# Altium PCB DS214SD.PcbDoc (part 1 of 2)
Units mm, origin at the board's own origin, x right, y up, seen from the top; angles counter-clockwise.
Board outline 549.66 x 200.53 mm, 2 copper layers (Top Layer, Bottom Layer); 205 components, 121 nets, 619 pads, 83 vias.
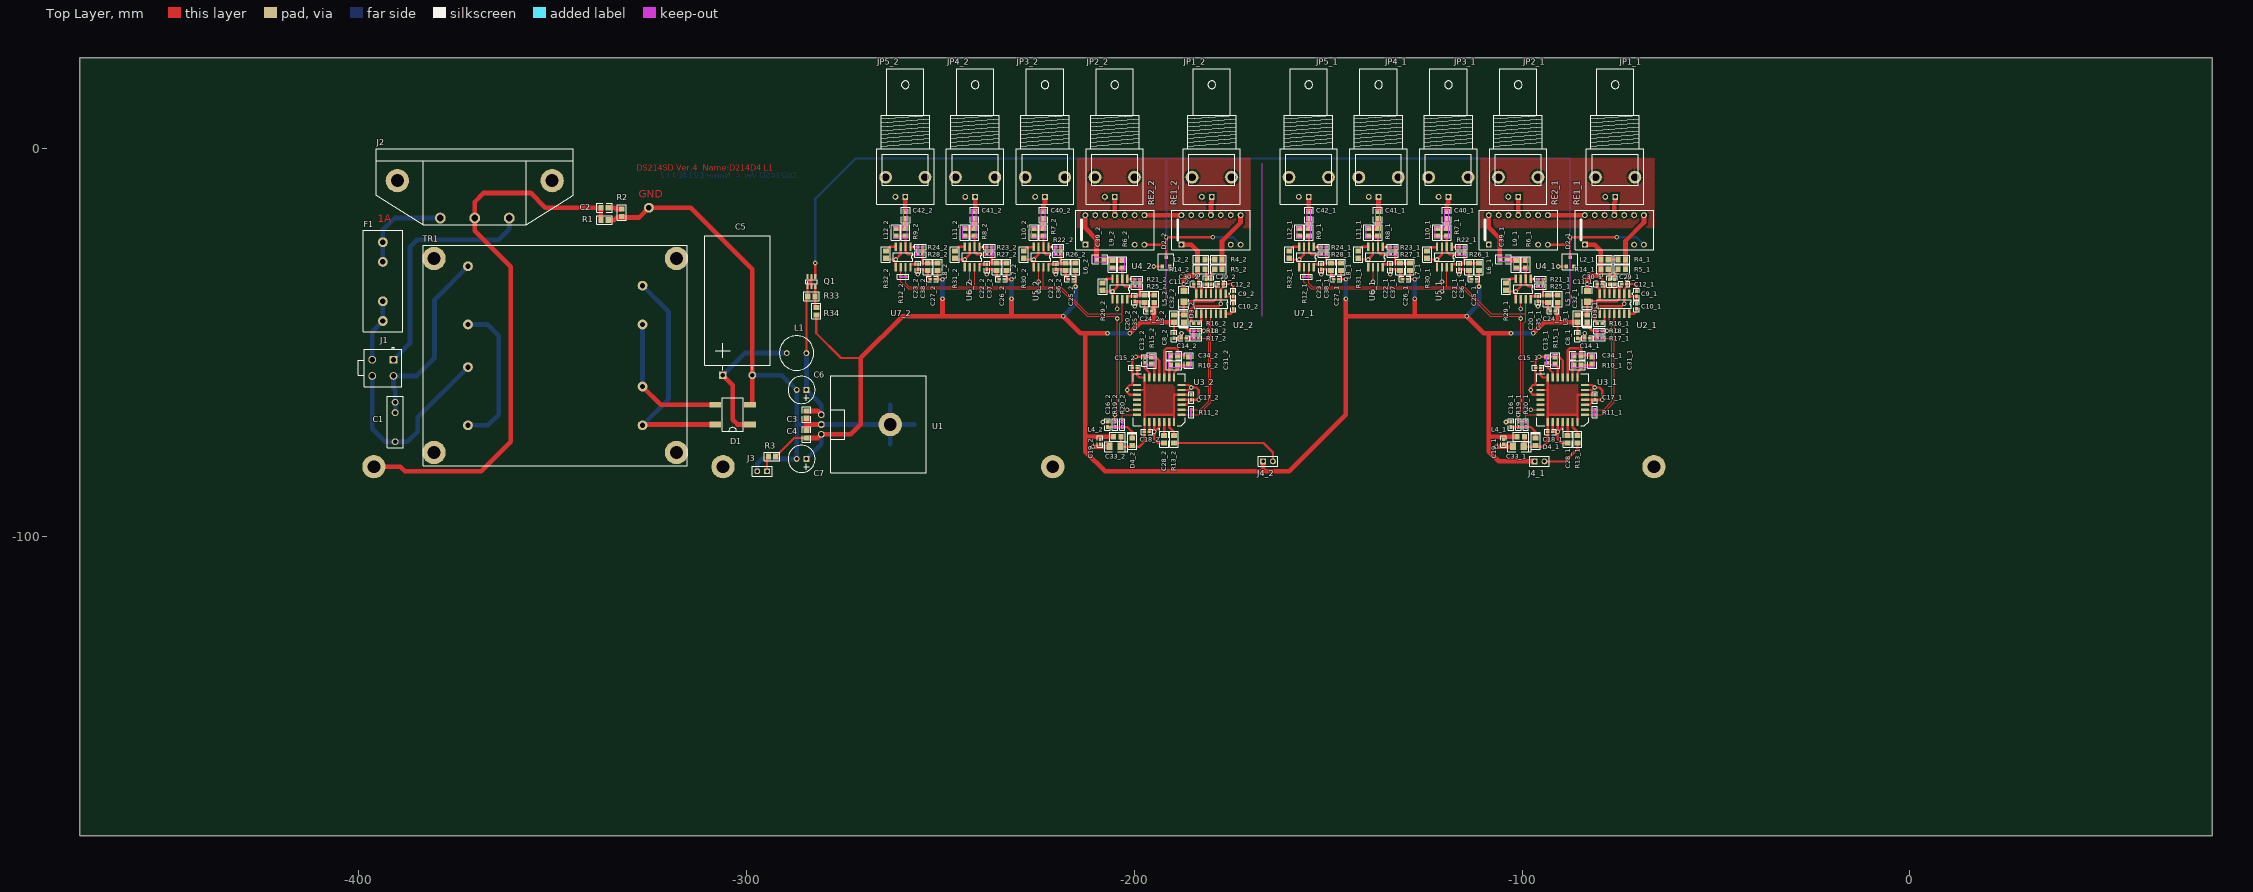
[diagram p0: Top Layer view]
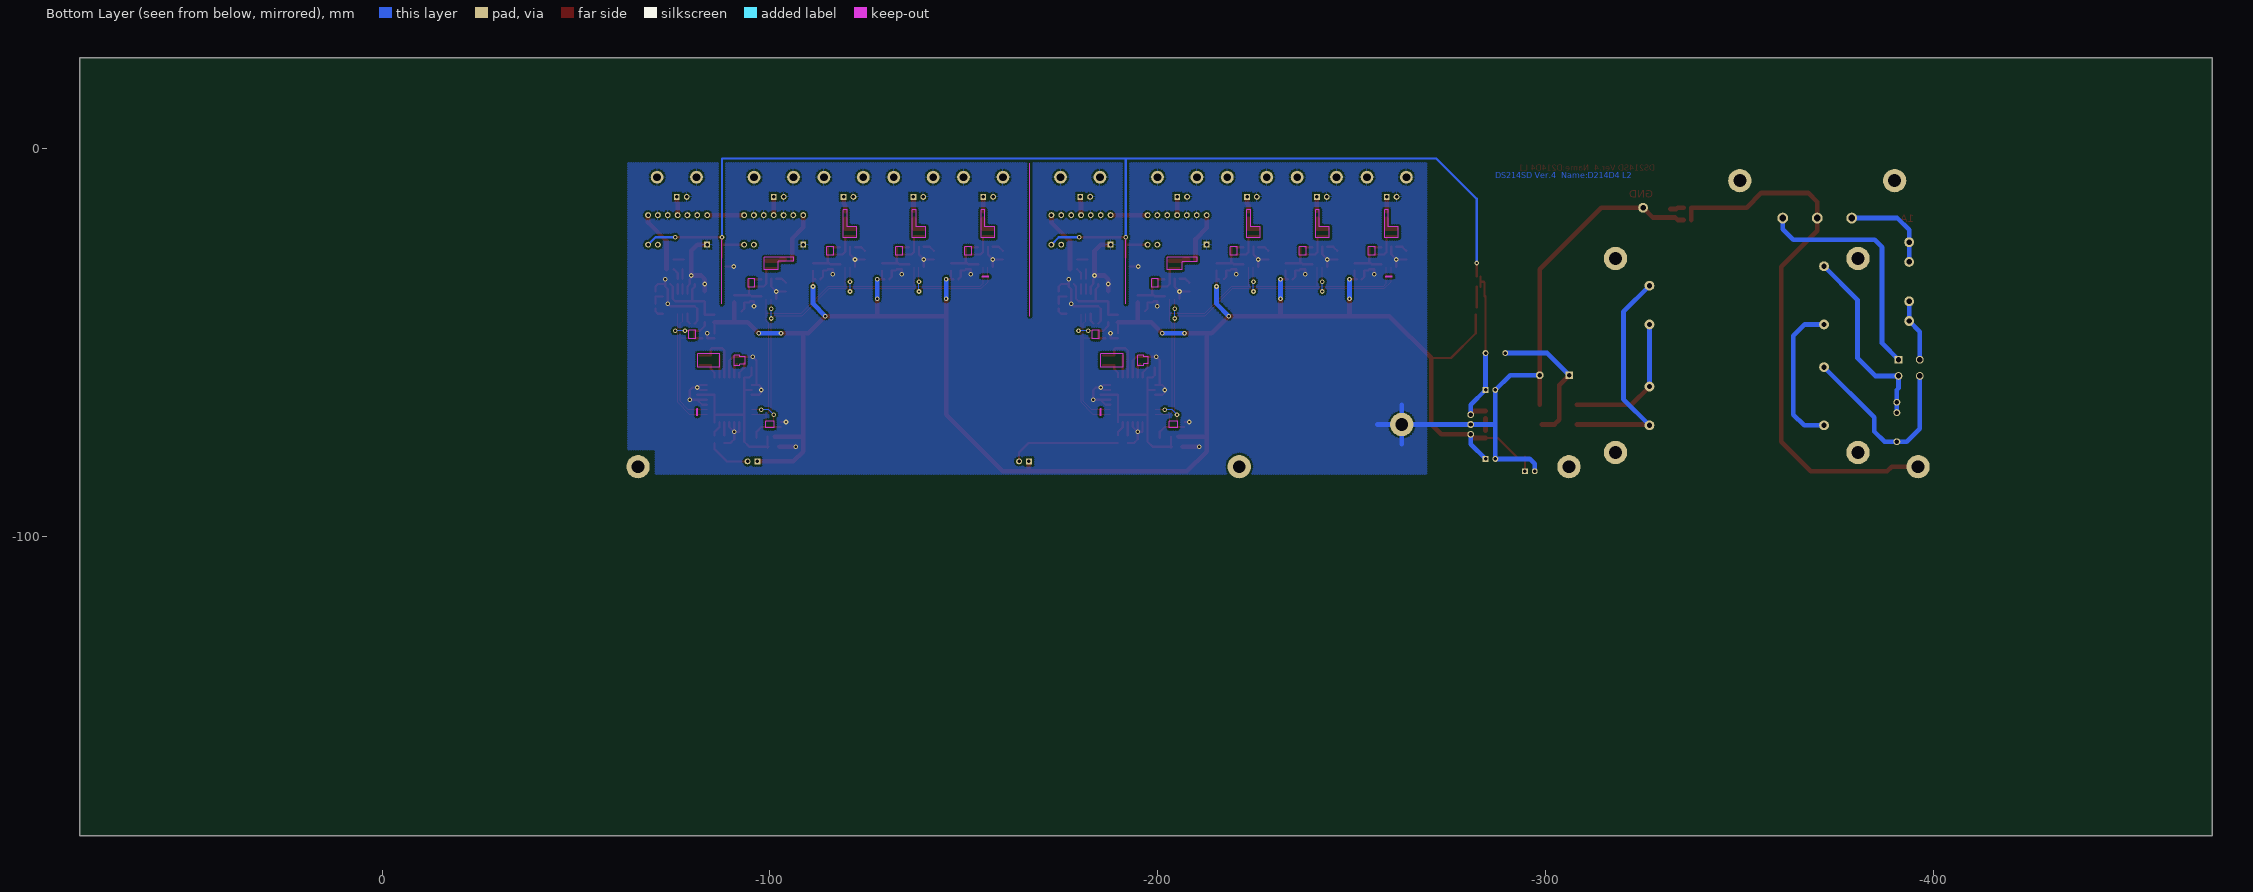
[diagram p1: Bottom Layer view, seen from below]

## Layer stack, top to bottom
Top Layer: signal copper 0.0356
Dielectric: dielectric 0.32, FR-4, Dk 4.8
Bottom Layer: signal copper 0.0356

## Board outline
-471.783,-177.165 -471.783,23.368 77.873,23.368 77.873,-177.165

## Design rules (kind name [scope] priority, off if disabled: settings)
Clearance [All] p1: gap=0.5
ComponentClearance [All] p1: gap=0.254 collisioncheckmode=0
HoleSize [All] p1: absolutevalues=TRUE maxlimit=3.5 minlimit=0.025 maxpercent=80.000 minpercent=20.000
PolygonConnect [All] p1: connectstyle=Relief reliefconductorwidth=0.3 reliefentries=4 polygonreliefangle="90 Angle"
RoomDefinition 1 [InComponentClass('1')] p1: confinementstyle=ConfineIn formatcopy=TRUE outline -163,-84 -65,-84 -65,25 -163,25
RoomDefinition 2 [InComponentClass('2')] p2: confinementstyle=ConfineIn formatcopy=TRUE outline -267,-84 -162,-84 -162,25 -267,25
RoutingLayers [All] p1: top layer=Horizontal bottom layer=Vertical
RoutingVias [All] p1: holewidth=0.6 width=1.2 viastyle="Through Hole" minholewidth=0.5 minwidth=1 maxholewidth=0.9 maxwidth=1.5
SolderMaskExpansion [All] p1: expansion=0.102
TestPointUsage [All] p1: valid=0 allowmultiple=FALSE
Testpoint [All] p1: side=15 testpointundercomponent=TRUE minsize=1.016 maxsize=2.54 preferedsize=1.524 minholesize=0 maxholesize=1.016 preferedholesize=0.813 testpointgrid=0.025 style=1023 order=-539222988
Width [All] p1: maxlimit=1.5 minlimit=0.254 preferedwidth=0.3 toplayer_prefwidth=1.2 bottomlayer_prefwidth=0.6 minimp=50.000000 maximp=50.000000 favimp=50.000000
15 further rules are at their usual default settings.

## Classes and differential pairs
component class 1: C8_1 C9_1 C10_1 C11_1 C12_1 C13_1 C14_1 C15_1 C16_1 C17_1 C18_1 C19_1 C20_1 C21_1 C22_1 C23_1 C24_1 C25_1 C26_1 C27_1 C28_1 C29_1 C30_1 C31_1 C32_1 C33_1 C34_1 C35_1 C36_1 C37_1 C38_1 C39_1 C40_1 C41_1 C42_1 D2_1 D3_1 D4_1 J4_1 JP1_1 JP2_1 JP3_1 JP4_1 JP5_1 L2_1 L3_1 L4_1 L5_1 L6_1 L7_1 L8_1 L9_1 L10_1 L11_1 L12_1 R4_1 R5_1 R6_1 R7_1 R8_1 R9_1 R10_1 R11_1 R12_1 R13_1 R14_1 R15_1 R16_1 R17_1 R18_1 R19_1 R20_1 R21_1 R22_1 R23_1 R24_1 R25_1 R26_1 R27_1 R28_1 R29_1 R30_1 R31_1 R32_1 RE1_1 RE2_1 U2_1 U3_1 U4_1 U5_1 U6_1 U7_1
component class 2: C8_2 C9_2 C10_2 C11_2 C12_2 C13_2 C14_2 C15_2 C16_2 C17_2 C18_2 C19_2 C20_2 C21_2 C22_2 C23_2 C24_2 C25_2 C26_2 C27_2 C28_2 C29_2 C30_2 C31_2 C32_2 C33_2 C34_2 C35_2 C36_2 C37_2 C38_2 C39_2 C40_2 C41_2 C42_2 D2_2 D3_2 D4_2 J4_2 JP1_2 JP2_2 JP3_2 JP4_2 JP5_2 L2_2 L3_2 L4_2 L5_2 L6_2 L7_2 L8_2 L9_2 L10_2 L11_2 L12_2 R4_2 R5_2 R6_2 R7_2 R8_2 R9_2 R10_2 R11_2 R12_2 R13_2 R14_2 R15_2 R16_2 R17_2 R18_2 R19_2 R20_2 R21_2 R22_2 R23_2 R24_2 R25_2 R26_2 R27_2 R28_2 R29_2 R30_2 R31_2 R32_2 RE1_2 RE2_2 U2_2 U3_2 U4_2 U5_2 U6_2 U7_2
component class DS214SD: C1 C2 C3 C4 C5 C6 C7 D1 F1 J1 J2 J3 L1 Q1 R1 R2 R3 R33 R34 TR1 U1
channel class 14SD: 1 2

## Components (designator, comment, footprint, x,y, rotation, side; value= is the part's Value field where it differs from the comment)
C1 "0.01x630V" C100N -390.525,-75.565 r90 top
C2 "0.1" C0805 -336.55,-15.24 r180 top
C3 "0.1" C0805 -284.48,-68.58 r90 top
C4 "0.1" C0805 -284.48,-73.66 r270 top
C5 "4700x25V" CPOL75L -302.26,-58.42 r180 top
C6 "100x25V" CPOL25 -284.48,-62.23 r180 top
C7 "100x25V" CPOL25 -284.48,-80.01 r180 top
C8_1 "0.1." C0402 -85.725,-48.26 r90 top (schematic designator C8)
C8_2 "0.1." C0402 -189.725,-48.26 r90 top (schematic designator C8)
C9_1 "0.1." C0402 -70.485,-37.465 r270 top (schematic designator C9)
C9_2 "0.1." C0402 -174.485,-37.465 r270 top (schematic designator C9)
C10_1 "0.1." C0402 -70.485,-40.64 r270 top (schematic designator C10)
C10_2 "0.1." C0402 -174.485,-40.64 r270 top (schematic designator C10)
C11_1 "0.1." C0402 -80.01,-34.925 r180 top (schematic designator C11)
C11_2 "0.1." C0402 -184.01,-34.925 r180 top (schematic designator C11)
C12_1 "0.1." C0402 -73.66,-34.925 r180 top (schematic designator C12)
C12_2 "0.1." C0402 -177.66,-34.925 r180 top (schematic designator C12)
C13_1 "0.1." C0402 -93.345,-54.61 r270 top (schematic designator C13)
C13_2 "0.1." C0402 -197.345,-54.61 r270 top (schematic designator C13)
C14_1 "0.1." C0402 -83.185,-48.895 r0 top (schematic designator C14)
C14_2 "0.1." C0402 -187.185,-48.895 r0 top (schematic designator C14)
C15_1 "0.1." C0402 -95.885,-56.515 r0 top (schematic designator C15)
C15_2 "0.1." C0402 -199.885,-56.515 r0 top (schematic designator C15)
C16_1 "0.1." C0402 -102.87,-71.12 r270 top (schematic designator C16)
C16_2 "0.1." C0402 -206.87,-71.12 r270 top (schematic designator C16)
C17_1 "0.1." C0402 -81.28,-64.135 r90 top (schematic designator C17)
C17_2 "0.1." C0402 -185.28,-64.135 r90 top (schematic designator C17)
C18_1 "0.1." C0402 -92.71,-73.025 r180 top (schematic designator C18)
C18_2 "0.1." C0402 -196.71,-73.025 r180 top (schematic designator C18)
C19_1 "0.1." C0402 -104.775,-75.565 r90 top (schematic designator C19)
C19_2 "0.1." C0402 -208.775,-75.565 r90 top (schematic designator C19)
C20_1 "0.1." C0402 -95.885,-38.735 r90 top (schematic designator C20)
C20_2 "0.1." C0402 -199.885,-38.735 r90 top (schematic designator C20)
C21_1 "0.1." C0402 -116.205,-30.48 r90 top (schematic designator C21)
C21_2 "0.1." C0402 -220.205,-30.48 r90 top (schematic designator C21)
C22_1 "0.1." C0402 -133.985,-30.48 r90 top (schematic designator C22)
C22_2 "0.1." C0402 -237.985,-30.48 r90 top (schematic designator C22)
C23_1 "0.1." C0402 -151.765,-30.48 r90 top (schematic designator C23)
C23_2 "0.1." C0402 -255.765,-30.48 r90 top (schematic designator C23)
C24_1 "0.1." C0402 -92.075,-41.91 r0 top (schematic designator C24)
C24_2 "0.1." C0402 -196.075,-41.91 r0 top (schematic designator C24)
C25_1 "0.1." C0402 -112.395,-33.655 r0 top (schematic designator C25)
C25_2 "0.1." C0402 -216.395,-33.655 r0 top (schematic designator C25)
C26_1 "0.1." C0402 -130.175,-33.655 r0 top (schematic designator C26)
C26_2 "0.1." C0402 -234.175,-33.655 r0 top (schematic designator C26)
C27_1 "0.1." C0402 -147.955,-33.655 r0 top (schematic designator C27)
C27_2 "0.1." C0402 -251.955,-33.655 r0 top (schematic designator C27)
C28_1 "4700pF" C0805 -88.265,-74.93 r90 top (schematic designator C28)
C28_2 "4700pF" C0805 -192.265,-74.93 r90 top (schematic designator C28)
C29_1 "0.01." C0402 -76.2,-34.29 r270 top (schematic designator C29)
C29_2 "0.01." C0402 -180.2,-34.29 r270 top (schematic designator C29)
C30_1 "0.01." C0402 -77.47,-34.29 r270 top (schematic designator C30)
C30_2 "0.01." C0402 -181.47,-34.29 r270 top (schematic designator C30)
C31_1 "3.3pF" C0805 -81.915,-54.61 r90 top (schematic designator C31)
C31_2 "3.3pF" C0805 -185.915,-54.61 r90 top (schematic designator C31)
C32_1 "10x10V" TA1206 -83.185,-38.1 r270 top (schematic designator C32)
C32_2 "10x10V" TA1206 -187.185,-38.1 r270 top (schematic designator C32)
C33_1 "10x10V" TA1206 -100.965,-76.835 r0 top (schematic designator C33)
C33_2 "10x10V" TA1206 -204.965,-76.835 r0 top (schematic designator C33)
C34_1 "0.015" C0805 -85.725,-53.34 r0 top (schematic designator C34)
C34_2 "0.015" C0805 -189.725,-53.34 r0 top (schematic designator C34)
C35_1 "1.0" C0805 -93.345,-38.735 r90 top (schematic designator C35)
C35_2 "1.0" C0805 -197.345,-38.735 r90 top (schematic designator C35)
C36_1 "1.0" C0805 -113.665,-30.48 r90 top (schematic designator C36)
C36_2 "1.0" C0805 -217.665,-30.48 r90 top (schematic designator C36)
C37_1 "1.0" C0805 -131.445,-30.48 r90 top (schematic designator C37)
C37_2 "1.0" C0805 -235.445,-30.48 r90 top (schematic designator C37)
C38_1 "1.0" C0805 -149.225,-30.48 r90 top (schematic designator C38)
C38_2 "1.0" C0805 -253.225,-30.48 r90 top (schematic designator C38)
C39_1 "1.0" C0805 -104.775,-28.575 r0 top (schematic designator C39)
C39_2 "1.0" C0805 -208.775,-28.575 r0 top (schematic designator C39)
C40_1 "1.0" C0805 -119.38,-17.145 r270 top (schematic designator C40)
C40_2 "1.0" C0805 -223.38,-17.145 r270 top (schematic designator C40)
C41_1 "1.0" C0805 -137.16,-17.145 r270 top (schematic designator C41)
C41_2 "1.0" C0805 -241.16,-17.145 r270 top (schematic designator C41)
C42_1 "1.0" C0805 -154.94,-17.145 r270 top (schematic designator C42)
C42_2 "1.0" C0805 -258.94,-17.145 r270 top (schematic designator C42)
D1 "Bridge DI158S" SDIP -303.53,-68.58 r90 top
D2_1 "BAV99" SOT23-BAV99 -87.63,-29.21 r0 top (schematic designator D2)
D2_2 "BAV99" SOT23-BAV99 -191.77,-29.21 r0 top (schematic designator D2)
D3_1 "BAS216" D0805 -83.185,-43.815 r270 top (schematic designator D3)
D3_2 "BAS216" D0805 -187.185,-43.815 r270 top (schematic designator D3)
D4_1 "BAS216" D0805 -96.52,-75.565 r90 top (schematic designator D4)
D4_2 "BAS216" D0805 -200.52,-75.565 r90 top (schematic designator D4)
F1 "1A" FUSE -393.7,-24.13 r270 top
J1 "MINIFIT4" MINIFIT4 -393.7,-56.515 r270 top
J2 "MAINS3P" MAINS3P -370,-17.9 r0 top locked
J3 "HEAD2" 2SIP100 -294.64,-83.185 r180 top
J4_1 "HEAD2" 2SIP100 -96.77,-80.645 r0 top locked (schematic designator J4)
J4_2 "HEAD2" 2SIP100 -166.77,-80.645 r0 top locked (schematic designator J4)
JP1_1 "BNC-RJ-SD" BNC_RJ -76,-12.45 r270 top locked (schematic designator JP1)
JP1_2 "BNC-RJ-SD" BNC_RJ -180,-12.45 r270 top locked (schematic designator JP1)
JP2_1 "BNC-RJ-SD" BNC_RJ -101,-12.45 r270 top locked (schematic designator JP2)
JP2_2 "BNC-RJ-SD" BNC_RJ -205,-12.45 r270 top locked (schematic designator JP2)
JP3_1 "BNC-RJ-SD" BNC_RJ -119,-12.45 r270 top locked (schematic designator JP3)
JP3_2 "BNC-RJ-SD" BNC_RJ -223,-12.45 r270 top locked (schematic designator JP3)
JP4_1 "BNC-RJ-SD" BNC_RJ -137,-12.45 r270 top locked (schematic designator JP4)
JP4_2 "BNC-RJ-SD" BNC_RJ -241,-12.45 r270 top locked (schematic designator JP4)
JP5_1 "BNC-RJ-SD" BNC_RJ -155,-12.45 r270 top locked (schematic designator JP5)
JP5_2 "BNC-RJ-SD" BNC_RJ -259,-12.45 r270 top locked (schematic designator JP5)
L1 "33uH" L050 -287.02,-52.705 r180 top
L2_1 "18nH" L0805 -78.74,-28.575 r180 top (schematic designator L2)
L2_2 "18nH" L0805 -182.74,-28.575 r180 top (schematic designator L2)
L3_1 "150nH" L0805 -85.725,-43.815 r90 top (schematic designator L3)
L3_2 "150nH" L0805 -189.725,-43.815 r90 top (schematic designator L3)
L4_1 "150nH" L0805 -100.33,-74.295 r180 top (schematic designator L4)
L4_2 "150nH" L0805 -204.33,-74.295 r180 top (schematic designator L4)
L5_1 "150nH" L0805 -90.805,-38.735 r90 top (schematic designator L5)
L5_2 "150nH" L0805 -194.805,-38.735 r90 top (schematic designator L5)
L6_1 "150nH" L0805 -111.125,-30.48 r90 top (schematic designator L6)
L6_2 "150nH" L0805 -215.125,-30.48 r90 top (schematic designator L6)
L7_1 "150nH" L0805 -128.905,-30.48 r90 top (schematic designator L7)
L7_2 "150nH" L0805 -232.905,-30.48 r90 top (schematic designator L7)
L8_1 "150nH" L0805 -146.685,-30.48 r90 top (schematic designator L8)
L8_2 "150nH" L0805 -250.685,-30.48 r90 top (schematic designator L8)
L9_1 "8.2nH" L0805 -101.6,-29.845 r90 top (schematic designator L9)
L9_2 "8.2nH" L0805 -205.6,-29.845 r90 top (schematic designator L9)
L10_1 "8.2nH" L0805 -121.92,-21.59 r90 top (schematic designator L10)
L10_2 "8.2nH" L0805 -225.92,-21.59 r90 top (schematic designator L10)
L11_1 "8.2nH" L0805 -139.7,-21.59 r90 top (schematic designator L11)
L11_2 "8.2nH" L0805 -243.7,-21.59 r90 top (schematic designator L11)
L12_1 "8.2nH" L0805 -157.48,-21.59 r90 top (schematic designator L12)
L12_2 "8.2nH" L0805 -261.48,-21.59 r90 top (schematic designator L12)
Q1 "IRF5810" TSOP6 -283.21,-34.29 r0 top
R1 "510" R0805 -336.55,-18.415 r180 top
R2 "75" R0805 -332.105,-16.51 r90 top
R3 "1.8K" R0805 -293.37,-79.375 r180 top
R4_1 "75" R0805 -74.295,-28.575 r0 top (schematic designator R4)
R4_2 "75" R0805 -178.295,-28.575 r0 top (schematic designator R4)
R5_1 "75" R0805 -74.295,-31.115 r0 top (schematic designator R5)
R5_2 "75" R0805 -178.295,-31.115 r0 top (schematic designator R5)
R6_1 "75" R0805 -99.06,-29.845 r90 top (schematic designator R6)
R6_2 "75" R0805 -203.06,-29.845 r90 top (schematic designator R6)
R7_1 "75" R0805 -119.38,-21.59 r90 top (schematic designator R7)
R7_2 "75" R0805 -223.38,-21.59 r90 top (schematic designator R7)
R8_1 "75" R0805 -137.16,-21.59 r90 top (schematic designator R8)
R8_2 "75" R0805 -241.16,-21.59 r90 top (schematic designator R8)
R9_1 "75" R0805 -154.94,-21.59 r90 top (schematic designator R9)
R9_2 "75" R0805 -258.94,-21.59 r90 top (schematic designator R9)
R10_1 "1.8K" R0805 -85.725,-55.88 r0 top (schematic designator R10)
R10_2 "1.8K" R0805 -189.725,-55.88 r0 top (schematic designator R10)
R11_1 "150." R0402 -81.28,-67.945 r270 top (schematic designator R11)
R11_2 "150." R0402 -185.28,-67.945 r270 top (schematic designator R11)
R12_1 "150." R0402 -155.575,-33.02 r0 top (schematic designator R12)
R12_2 "150." R0402 -259.575,-33.02 r0 top (schematic designator R12)
R13_1 "1K" R0805 -85.725,-74.93 r270 top (schematic designator R13)
R13_2 "1K" R0805 -189.725,-74.93 r270 top (schematic designator R13)
R14_1 "113" R0805 -78.74,-31.115 r180 top (schematic designator R14)
R14_2 "113" R0805 -182.74,-31.115 r180 top (schematic designator R14)
R15_1 "365" R0805 -91.44,-54.61 r90 top (schematic designator R15)
R15_2 "365" R0805 -195.44,-54.61 r90 top (schematic designator R15)
R16_1 "0*" R0402 -80.01,-45.085 r0 top (schematic designator R16)
R16_2 "0*" R0402 -184.01,-45.085 r0 top (schematic designator R16)
R17_1 "75." R0402 -80.01,-48.895 r0 top (schematic designator R17)
R17_2 "75." R0402 -184.01,-48.895 r0 top (schematic designator R17)
R18_1 "75." R0402 -80.01,-46.99 r0 top (schematic designator R18)
R18_2 "75." R0402 -184.01,-46.99 r0 top (schematic designator R18)
R19_1 "75." R0402 -100.965,-71.12 r90 top (schematic designator R19)
R19_2 "75." R0402 -204.965,-71.12 r90 top (schematic designator R19)
R20_1 "75." R0402 -99.06,-71.12 r90 top (schematic designator R20)
R20_2 "75." R0402 -203.06,-71.12 r90 top (schematic designator R20)
R21_1 "75." R0402 -95.25,-33.655 r180 top (schematic designator R21)
R21_2 "75." R0402 -199.25,-33.655 r180 top (schematic designator R21)
R22_1 "75." R0402 -115.57,-25.4 r180 top (schematic designator R22)
R22_2 "75." R0402 -219.57,-25.4 r180 top (schematic designator R22)
R23_1 "75." R0402 -133.35,-25.4 r180 top (schematic designator R23)
R23_2 "75." R0402 -237.35,-25.4 r180 top (schematic designator R23)
R24_1 "75." R0402 -151.13,-25.4 r180 top (schematic designator R24)
R24_2 "75." R0402 -255.13,-25.4 r180 top (schematic designator R24)
R25_1 "75." R0402 -95.25,-35.56 r180 top (schematic designator R25)
R25_2 "75." R0402 -199.25,-35.56 r180 top (schematic designator R25)
R26_1 "75." R0402 -115.57,-27.305 r180 top (schematic designator R26)
R26_2 "75." R0402 -219.57,-27.305 r180 top (schematic designator R26)
R27_1 "75." R0402 -133.35,-27.305 r180 top (schematic designator R27)
R27_2 "75." R0402 -237.35,-27.305 r180 top (schematic designator R27)
R28_1 "75." R0402 -151.13,-27.305 r180 top (schematic designator R28)
R28_2 "75." R0402 -255.13,-27.305 r180 top (schematic designator R28)
R29_1 "56" R0805 -104.14,-35.56 r90 top (schematic designator R29)
R29_2 "56" R0805 -208.14,-35.56 r90 top (schematic designator R29)
R30_1 "56" R0805 -124.46,-27.305 r90 top (schematic designator R30)
R30_2 "56" R0805 -228.46,-27.305 r90 top (schematic designator R30)
R31_1 "56" R0805 -142.24,-27.305 r90 top (schematic designator R31)
R31_2 "56" R0805 -246.24,-27.305 r90 top (schematic designator R31)
R32_1 "56" R0805 -160.02,-27.305 r90 top (schematic designator R32)
R32_2 "56" R0805 -264.02,-27.305 r90 top (schematic designator R32)
R33 "10K" R0805 -283.21,-38.1 r0 top
R34 "10K" R0805 -281.94,-41.91 r270 top
RE1_1 "RK1-12V" "RELAY RK" -83.82,-24.765 r0 top (schematic designator RE1)
RE1_2 "RK1-12V" "RELAY RK" -187.82,-24.765 r0 top (schematic designator RE1)
RE2_1 "RK1R-12V" "RELAY RK" -108.585,-24.765 r0 top (schematic designator RE2)
RE2_2 "RK1R-12V" "RELAY RK" -212.585,-24.765 r0 top (schematic designator RE2)
TR1 "TR 2x9/777mA" TR14VA -349.25,-53.34 r0 top
U1 "PT5101A" PT5101A-LOW -280.67,-71.12 r270 top
U2_1 "GS9024" SO-14 -76.2,-40.005 r180 top (schematic designator U2)
U2_2 "GS9024" SO-14 -180.2,-40.005 r180 top (schematic designator U2)
U3_1 "GS9035A" PLCC-28 -89.535,-64.77 r180 top (schematic designator U3)
U3_2 "GS9035A" PLCC-28 -193.535,-64.77 r180 top (schematic designator U3)
U4_1 "GS9028" SO-8 -99.695,-36.195 r180 top (schematic designator U4)
U4_2 "GS9028" SO-8 -203.695,-36.195 r180 top (schematic designator U4)
U5_1 "GS9028" SO-8 -120.015,-27.94 r180 top (schematic designator U5)
U5_2 "GS9028" SO-8 -224.015,-27.94 r180 top (schematic designator U5)
U6_1 "GS9028" SO-8 -137.795,-27.94 r180 top (schematic designator U6)
U6_2 "GS9028" SO-8 -241.795,-27.94 r180 top (schematic designator U6)
U7_1 "GS9028" SO-8 -155.575,-27.94 r180 top (schematic designator U7)
U7_2 "GS9028" SO-8 -259.575,-27.94 r180 top (schematic designator U7)

## Footprints (in the part's own frame and the unit in brackets; to place one, negate y for a bottom-side part, rotate by r counter-clockwise, add the part's x,y. Pads: shape width x height; smd on the part's side, far side on the other; paste and mask are expansions set on the pad)
2SIP100 [mm]
  rect 1.5x1.5 hole 0.9: 1(0,0)
  round 1.5 hole 0.9: 2(2.54,0)
  silkscreen extent -1.27,-1.27 3.81,1.27
BNC_RJ [mm]
  rect 1.5x1.5 hole 0.9: 1(0,0)
  round 1.5 hole 0.9: 2(0,-2.54)
  round 3.3 hole 2: 3(-5.08,5.08) 4(-5.08,-5.08)
  silkscreen extent -33,-7.4 1.9,7.4
C100N [mil]
  round 70 hole 45: 1(0,0) 2(295.28,0) 2(400,0)
  silkscreen extent -60,-80 460,80
C0402 [mil]
  rect 36x28 smd: 1(-25.59,0) 2(25.59,0)
  silkscreen extent -58,-27 58,27
C0805 [mil]
  rect 52x60 smd: 1(-37.4,0) 2(37.4,0)
  silkscreen extent -79,-45 79,45
CPOL25 [mm]
  rect 1.5x1.5 hole 0.9: 1(0,0)
  round 1.5 hole 0.9: 2(2.54,0)
  silkscreen extent -2.22,-3.49 4.76,3.49
CPOL75L [mm]
  rect 2x2 hole 1.2: 1(3.81,0)
  round 2 hole 1.2: 2(-3.81,0)
  silkscreen extent -8.5,-36 8.5,-1.27
D0805 [mm]
  rect 1.3x1.5 smd: 1(-0.95,0) 2(0.95,0)
  silkscreen extent -2.01,-1.14 2.41,1.14
FUSE [mil]
  round 100 hole 55: 1(0,0) 1(200,0) 2(600,0) 2(800,0)
  silkscreen extent -120,-200 910,200
L050 [mm]
  round 1.5 hole 0.9: 1(2.54,0) 2(-2.54,0)
  silkscreen extent -4.44,-4.44 4.44,4.44
L0805 [mm]
  rect 1.3x1.5 smd: 1(-0.95,0) 2(0.95,0)
  silkscreen extent -2.01,-1.14 2.01,1.14
MAINS3P [mil]
  round 110 hole 70: 1(-350,0) 2(0,0) 3(350,0)
  round 237 hole 130: 4(785,380) 5(-785,380)
  silkscreen extent -1000,-70 1000,705
MINIFIT4 [mm]
  rect 2x2 hole 1.4: 1(-2.1,2.75)
  round 2 hole 1.4: 2(2.1,2.75) 3(-2.1,-2.75) 4(2.1,-2.75)
  silkscreen extent -5.3,-6.32 4.84,4.84
PLCC-28 [mm]
  rect 0.6x2.1 smd: 1(0,5.75) 2(-1.27,5.75) 3(-2.54,5.75) 4(-3.81,5.75) 12(-3.81,-5.75) 13(-2.54,-5.75) 14(-1.27,-5.75) 15(0,-5.75) 16(1.27,-5.75) 17(2.54,-5.75) 18(3.81,-5.75) 26(3.81,5.75) 27(2.54,5.75) 28(1.27,5.75)
  rect 2.1x0.6 smd: 5(-5.75,3.81) 6(-5.75,2.54) 7(-5.75,1.27) 8(-5.75,0) 9(-5.75,-1.27) 10(-5.75,-2.54) 11(-5.75,-3.81) 19(5.75,-3.81) 20(5.75,-2.54) 21(5.75,-1.27) 22(5.75,0) 23(5.75,1.27) 24(5.75,2.54) 25(5.75,3.81)
  silkscreen extent -6.67,-6.69 6.67,7.72
PT5101A-LOW [mil]
  round 70 hole 45: 1(-100,0) 2(0,0) 3(100,0)
  round 237 hole 130: 4(0,700)
  silkscreen extent -492,98 492,1063
R0402 [mil]
  rect 36x28 smd: 1(-25.59,0) 2(25.59,0)
  silkscreen extent -58,-27 58,27
R0805 [mil] "SMD resistor 0805"
  rect 52x60 smd: 1(-37.4,0) 2(37.4,0)
  silkscreen extent -79,-45 79,45
"RELAY RK" [mm]
  rect 1.5x1.5 hole 0.9: 1(0,0)
  round 1.5 hole 0.9: 6(12.7,0) 7(15.24,0) 8(15.24,7.62) 9(12.7,7.62) 10(10.16,7.62) 11(7.62,7.62) 12(5.08,7.62) 13(2.54,7.62) 14(0,7.62)
  silkscreen extent -2.48,-1.29 17.72,8.91
SDIP [mm]
  rect 1.5x3 smd: 1(-2.54,-4.5) 2(2.54,-4.5) 3(2.54,4.5) 4(-2.54,4.5)
  silkscreen extent -4.3,-2.7 4.3,2.7
SO-8 [mm]
  rect 0.6x2.2 smd: 1(-1.905,-2.6) 2(-0.635,-2.6) 3(0.635,-2.6) 4(1.905,-2.6) 5(1.905,2.6) 6(0.635,2.6) 7(-0.635,2.6) 8(-1.905,2.6)
  silkscreen extent -2.88,-2.72 2.5,1.1
SO-14 [mm]
  rect 0.6x2.2 smd: 1(-3.81,-2.6) 2(-2.54,-2.6) 3(-1.27,-2.6) 4(0,-2.6) 5(1.27,-2.6) 6(2.54,-2.6) 7(3.81,-2.6) 8(3.81,2.6) 9(2.54,2.6) 10(1.27,2.6) 11(0,2.6) 12(-1.27,2.6) 13(-2.54,2.6) 14(-3.81,2.6)
  silkscreen extent -4.78,-2.72 4.38,1.1
SOT23-BAV99 [mm]
  rect 0.9x0.95 smd: 1(0,1.175) 2(-0.95,-1.175) 3(0.95,-1.175)
  silkscreen extent -2,-2.05 2,2.05
TA1206 [mm] "Tantalium Cap"
  rect 1.6x1.8 smd: 1(1.4,0) 2(-1.4,0)
  silkscreen extent -2.67,-1.3 3.28,1.3
TR14VA [mm]
  round 2.54 hole 1.397: 1(-22.5,23) 4(-22.5,8) 6(-22.5,-3) 9(-22.5,-18) 12(22.5,-18) 14(22.5,-8) 17(22.5,8) 19(22.5,18)
  round 6.02 hole 3.302: 20(-31.25,25) 21(-31.25,-25) 22(31.25,-25) 23(31.25,25)
  silkscreen extent -34.04,-28.45 34.04,28.45
TSOP6 [mm]
  rect 0.6x1.2 smd: 1(-1,-1.325) 2(0,-1.325) 3(1,-1.325) 4(1,1.325) 5(0,1.325) 6(-1,1.325)
  silkscreen extent -1.5,-0.5 1.5,0.5

## Part data
C1 C2 C3 C4 C8_1 C8_2 C9_1 C9_2 C10_1 C10_2 C11_1 C11_2 C12_1 C12_2 C13_1 C13_2 C14_1 C14_2 C15_1 C15_2 C16_1 C16_2 C17_1 C17_2 C18_1 C18_2 C19_1 C19_2 C20_1 C20_2 C21_1 C21_2 C22_1 C22_2 C23_1 C23_2 C24_1 C24_2 C25_1 C25_2 C26_1 C26_2 C27_1 C27_2 C28_1 C28_2 C29_1 C29_2 C30_1 C30_2 C31_1 C31_2 C34_1 C34_2 C35_1 C35_2 C36_1 C36_2 C37_1 C37_2 C38_1 C38_2 C39_1 C39_2 C40_1 C40_2 C41_1 C41_2 C42_1 C42_2: library part Cap, "Capacitor"
C5 C6 C7 C32_1 C32_2 C33_1 C33_2: library part "Cap Pol", "Polarized Capacitor (Radial)"
D3_1 D3_2 D4_1 D4_2: library part Diode, "Default Diode"
F1: library part Fuse, "Fuse"
J1: library part HEAD4
J2: library part HEAD3
JP1_1 JP1_2 JP2_1 JP2_2 JP3_1 JP3_2 JP4_1 JP4_2 JP5_1 JP5_2: library part BNC
L1 L2_1 L2_2 L3_1 L3_2 L4_1 L4_2 L5_1 L5_2 L6_1 L6_2 L7_1 L7_2 L8_1 L8_2 L9_1 L9_2 L10_1 L10_2 L11_1 L11_2 L12_1 L12_2: library part INDUCTOR
Q1: "P-Channel MOSFET"
R1 R2 R3 R4_1 R4_2 R5_1 R5_2 R6_1 R6_2 R7_1 R7_2 R8_1 R8_2 R9_1 R9_2 R10_1 R10_2 R11_1 R11_2 R12_1 R12_2 R13_1 R13_2 R14_1 R14_2 R15_1 R15_2 R16_1 R16_2 R17_1 R17_2 R18_1 R18_2 R19_1 R19_2 R20_1 R20_2 R21_1 R21_2 R22_1 R22_2 R23_1 R23_2 R24_1 R24_2 R25_1 R25_2 R26_1 R26_2 R27_1 R27_2 R28_1 R28_2 R29_1 R29_2 R30_1 R30_2 R31_1 R31_2 R32_1 R32_2 R33 R34: library part Res, "Resistor"
RE1_1 RE1_2: library part "RELAY RK1"
RE2_1 RE2_2: library part "RELAY RK1R"

## Free pads (board coordinates)
  round 6 hole 3.3: 0(-396,-82) 0(-306,-82) 0(-221,-82) 0(-66,-82)
  round 2.54 hole 1.397: 1(-325.12,-15.24)

## Via types
v1: diameter 1.2, hole 0.6, Top Layer to Bottom Layer, 83 vias

## Nets (pads, with @x,y where several pads share a name; then routed paths per layer and width w, separated by ;. In a path a pad name is that pad's centre, name@x,y a point inside that pad or via, vN(x,y) a via of type N, cw(c..) or ccw(c..) an arc to the next point about the centre after c; other vN are vias at no path point)
+5V: C4.2 C7.1 C8_1.2 C8_2.2 C19_1.2 C19_2.2 C24_1.2 C24_2.2 C25_1.2 C25_2.2 C26_1.2 C26_2.2 C27_1.2 C27_2.2 J4_1.1 J4_2.1 L3_1.1 L3_2.1 L4_1.2 L4_2.2 L5_1.1 L5_2.1 L6_1.1 L6_2.1 L7_1.1 L7_2.1 L8_1.1 L8_2.1 R3.1 R34.2 U1.3 | length 509.7
  Top Layer w0.6: R3.1@-292.42,-79.375 -287.655,-74.61 C4.2@-284.48,-74.61 ; R34.2@-281.94,-42.86 -281.94,-47.625 -275.59,-53.975 -270.51,-53.975 ; C27_2.2@-251.305,-33.655 v1(-249.415,-33.655) ; -250.685,-33.655 L8_2.1@-250.685,-31.43 ; C26_2.2@-233.525,-33.655 v1(-231.635,-33.655) ; -232.905,-33.655 L7_2.1@-232.905,-31.43 ; C25_2.2@-215.745,-33.655 -215.125,-33.655 ; v1(-215.125,-35.56) L6_2.1@-215.125,-31.43 ; C8_2.2@-189.725,-47.61 L3_2.1@-189.725,-44.765 ; C27_1.2@-147.305,-33.655 v1(-145.415,-33.655) ; -146.685,-33.655 L8_1.1@-146.685,-31.43 ; C26_1.2@-129.525,-33.655 v1(-127.635,-33.655) ; -128.905,-33.655 L7_1.1@-128.905,-31.43 ; C25_1.2@-111.745,-33.655 -111.125,-33.655 ; v1(-111.125,-35.56) L6_1.1@-111.125,-31.43 ; C8_1.2@-85.725,-47.61 L3_1.1@-85.725,-44.765
  Top Layer w1.2: C4.2@-284.48,-74.61 -281.62,-74.61 U1.3@-280.67,-73.66 -273.05,-73.66 -270.51,-71.12 -270.51,-53.975 -259.715,-43.18 v1(-218.3,-43.18) -213.855,-47.625 v1(-206.87,-47.625) ; -249.415,-43.18 v1(-249.415,-38.735) ; -231.635,-43.18 v1(-231.635,-38.735) ; -212.585,-74.295 L4_2.2@-205.28,-74.295 ; -212.585,-47.625 -212.585,-78.105 -207.505,-83.185 -160.02,-83.185 -145.415,-68.58 v1(-145.415,-38.735) ; v1(-201.155,-47.625) -198.295,-44.765 L3_2.1@-189.725,-44.765 ; -194.805,-44.765 L5_2.1@-194.805,-39.685 ; -166.77,-83.185 J4_2.1@-166.77,-80.645 ; -145.415,-43.18 v1(-114.3,-43.18) -109.855,-47.625 v1(-102.87,-47.625) ; -127.635,-43.18 v1(-127.635,-38.735) ; -108.585,-74.295 L4_1.2@-101.28,-74.295 ; -108.585,-47.625 -108.585,-78.105 -106.045,-80.645 J4_1.1@-96.77,-80.645 ; v1(-97.155,-47.625) -94.295,-44.765 L3_1.1@-85.725,-44.765 ; -90.805,-44.765 L5_1.1@-90.805,-39.685
  Bottom Layer w1.2: C7.1@-284.48,-80.01 -280.67,-76.2 U1.3@-280.67,-73.66 ; v1(-249.415,-38.735) v1(-249.415,-33.655) ; v1(-231.635,-38.735) v1(-231.635,-33.655) ; v1(-218.3,-43.18) -215.125,-40.005 v1(-215.125,-35.56) ; v1(-206.87,-47.625) v1(-201.155,-47.625) ; v1(-145.415,-38.735) v1(-145.415,-33.655) ; v1(-127.635,-38.735) v1(-127.635,-33.655) ; v1(-114.3,-43.18) -111.125,-40.005 v1(-111.125,-35.56) ; v1(-102.87,-47.625) v1(-97.155,-47.625)
+12V: C5.1 D1.1 L1.1 | length 36.4
  Top Layer w1.2: C5.1@-306.07,-58.42 -303.53,-60.96 -303.53,-69.85 -302.26,-71.12 D1.1@-299.03,-71.12
  Bottom Layer w1.2: C5.1@-306.07,-58.42 -300.355,-52.705 L1.1@-289.56,-52.705